# Altium PCB ESP_helper.PcbDoc
Units mil, origin at the board's own origin, x right, y up, seen from the top; angles counter-clockwise.
Board outline 1800 x 825 mil, 2 copper layers (Top Layer, Bottom Layer); 3 components, 3 nets, 17 pads, 0 vias.
Unrouted connection lines stored in the file: 3.
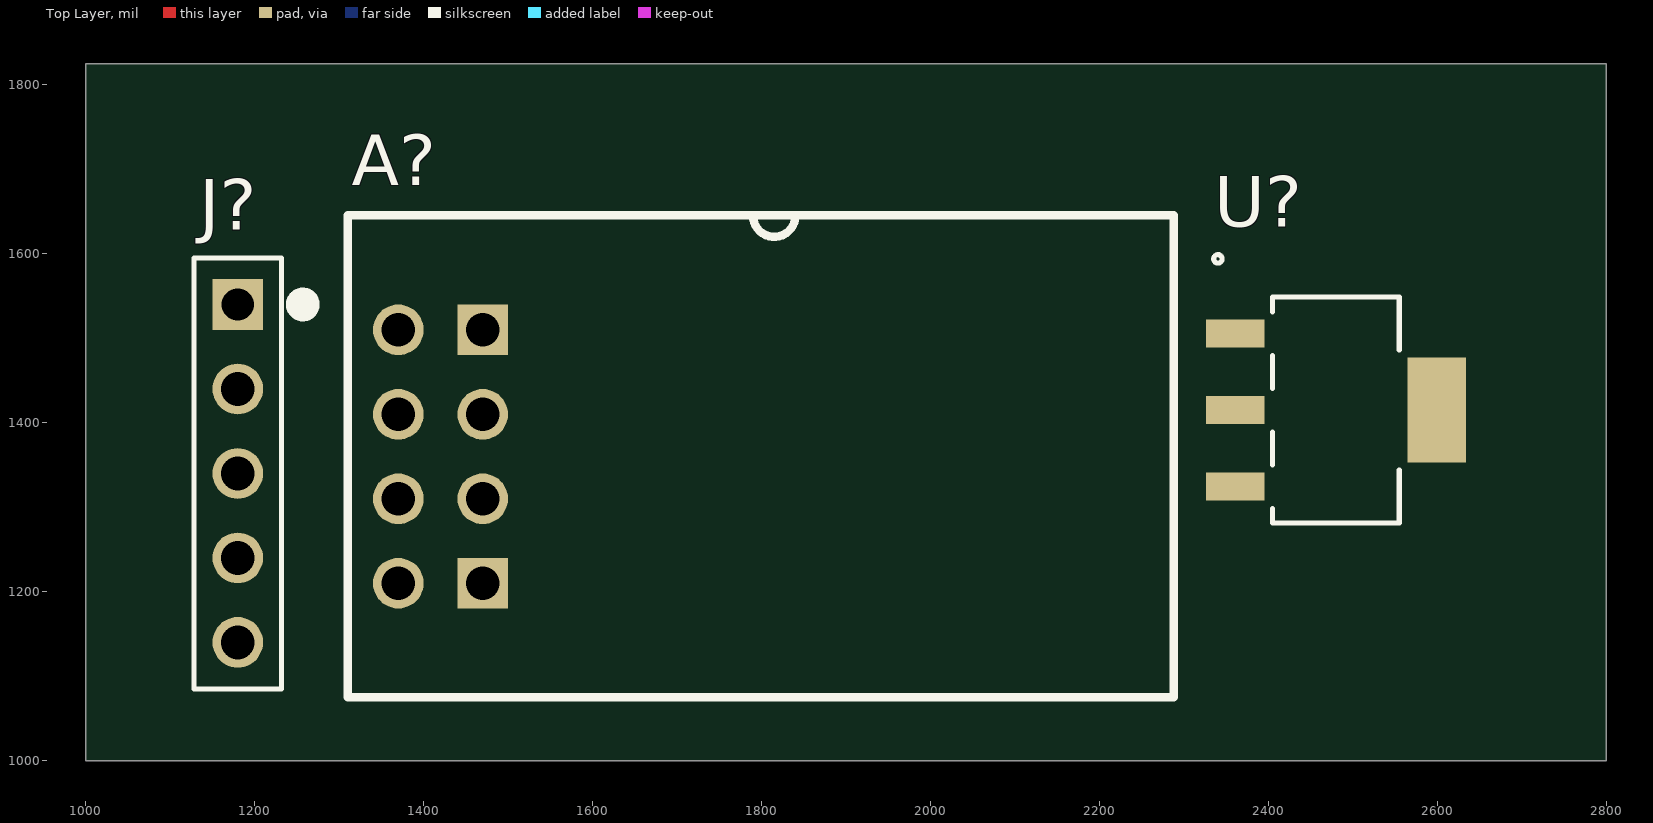
[diagram p0: Top Layer view]
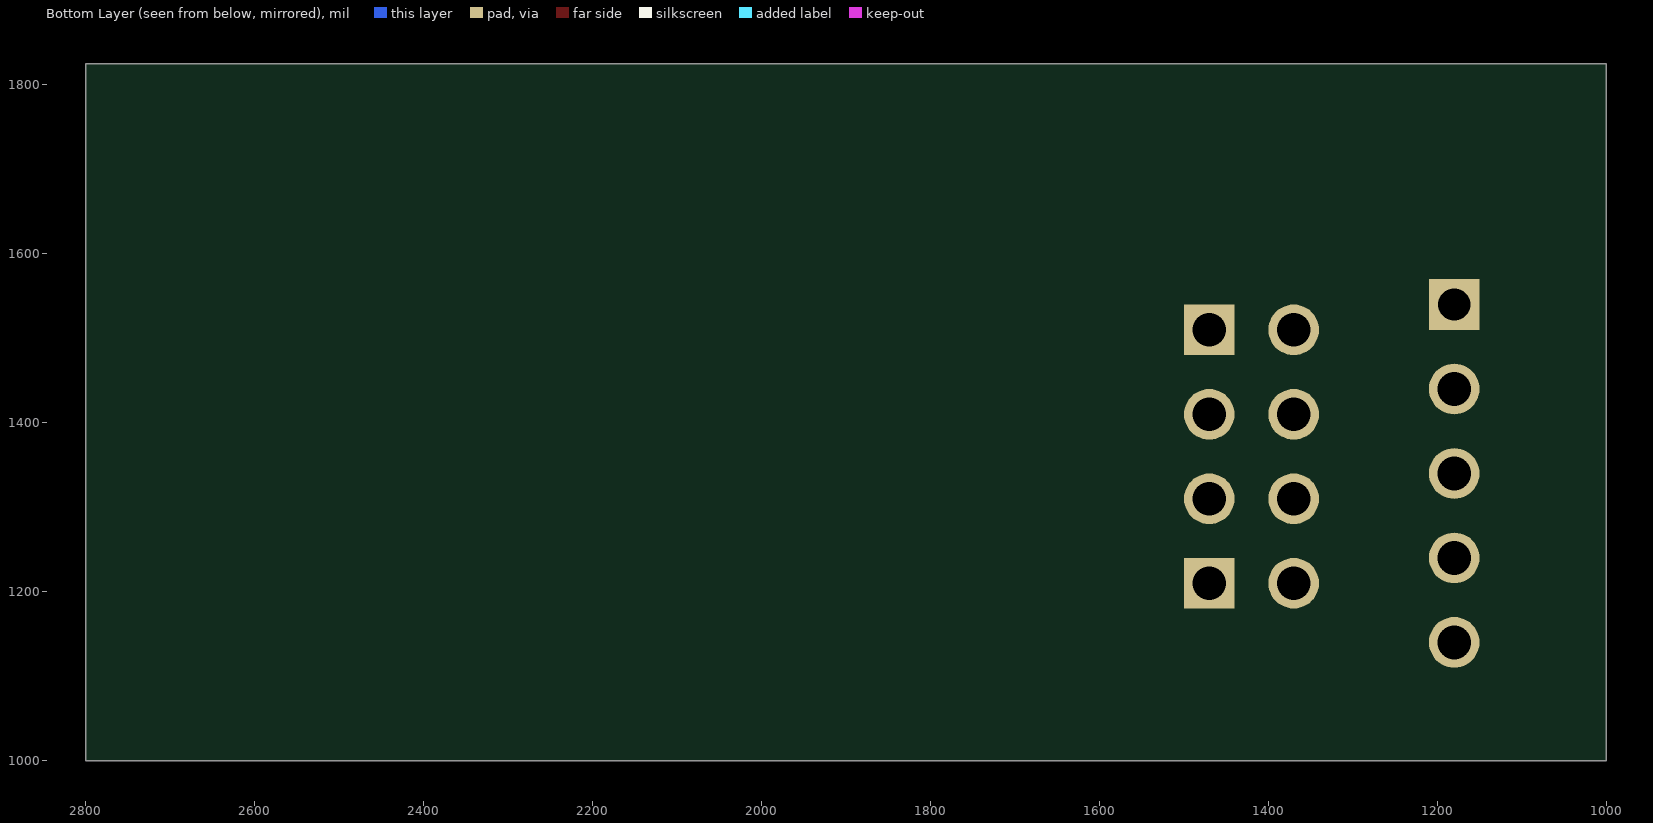
[diagram p1: Bottom Layer view, seen from below]

## Layer stack, top to bottom
Top Solder: solder mask 0.4, Solder Resist, Dk 3.5
Top Layer: signal copper 1.4
Dielectric 1: dielectric 12.6, FR-4, Dk 4.8
Bottom Layer: signal copper 1.4
Bottom Solder: solder mask 0.4, Solder Resist, Dk 3.5

## Board outline
1000,1000 2800,1000 2800,1825 1000,1825

## Design rules (kind name [scope] priority, off if disabled: settings)
Clearance [All] p1: gap=10 ignorepadtopadclearanceinfootprint=FALSE except(0: Arc-Hole Track-Hole SMDPad-Hole THPad-Hole Via-Hole Fill-Hole Poly-Hole Region-Hole Text-Hole)
PolygonConnect [All] p1: connectstyle=Relief reliefconductorwidth=10 reliefentries=4 polygonreliefangle="90 Angle" airgapwidth=10
RoutingVias [All] p1: holewidth=28 width=50 viastyle="Through Hole" minholewidth=28 minwidth=50 maxholewidth=28 maxwidth=50
SolderMaskExpansion [All] p1: expansion=4
Width [All] p1: maxlimit=10 minlimit=10 preferedwidth=10
30 further rules are at their usual default settings.

## Components (designator, comment, footprint, x,y, rotation, side; value= is the part's Value field where it differs from the comment)
A? "ESP8266" ESP8266 1370,1510 r0 top
J? "5x Header Pins" "5 HEADER PIN" 1180,1540 r90 top value=Value
U? "3.3V regulator" SOT-223 2480,1415 r270 top

## Footprints (in the part's own frame and the unit in brackets; to place one, negate y for a bottom-side part, rotate by r counter-clockwise, add the part's x,y. Pads: shape width x height; smd on the part's side, far side on the other; paste and mask are expansions set on the pad)
"5 HEADER PIN" [mil]
  rect 60x60 hole 38 mask+0: 1(0,0)
  round 60 hole 40 mask+0: 2(-100,0) 3(-200,0) 4(-300,0) 5(-400,0)
  silkscreen extent -455,-87 55,52, body extent -450,-50 50,50, height 374
ESP8266 [mil]
  round 60 hole 40: 1(0,0) 2(0,-100) 3(0,-200) 4(0,-300) 6(100,-200) 7(100,-100)
  rect 60x60 hole 40: 5(100,-300) 8(100,0)
  silkscreen extent -60,-435 918,136, body extent -58,-436 918,135, height 221
SOT-223 [mm]
  rect 0.851x1.761 smd paste+0 mask+0: 1(-2.3,-3.025) 2(0,-3.025) 3(2.3,-3.025)
  rect 3.151x1.761 smd paste+0 mask+0: 2(0,3.025)
  silkscreen extent -4.67,-3.68 3.4,1.9, body extent -3.27,-3.68 5.33,3.42, height 1.65

## Part data
A?: "RX TXRX MODULE WIFI TRACE ANT TH", Supplier Part Number 1=1597-1145-ND, Supplier 1=Digi-Key
J?: library part "5x Header Pin", "CONN HEADER VERT 5POS 2.54MM", Manufacturer_Part_Number=77311-818-36LF, Built_By=EMA_UL_Team, Copyright="Copyright (C) 2018 Accelerated Designs. All rights reserved", RefDes=RefDes, SourceLibrary=Amphenol_2013-08-06_Bergstik_1Row_77311, Type=DEV, Vendor=Amphenol
U?: library part AP7361-33E-13, "IC REG LINEAR 3.3V 1A SOT223", Supplier Part Number 1=AP7361-33E-13DICT-ND, Built_By=EMA_UL_Team, Copyright="Copyright (C) 2018 Accelerated Designs. All rights reserved", Manufacturer_Part_Number=AP7361-33E-13, RefDes=RefDes, SourceLibrary=DIODESINC_2_2015-08-18, Supplier 1=Digi-Key, Type=DEV, Vendor="Diodes Inc"

## Nets (pads, with @x,y where several pads share a name; then routed paths per layer and width w, separated by ;. In a path a pad name is that pad's centre, name@x,y a point inside that pad or via, vN(x,y) a via of type N, cw(c..) or ccw(c..) an arc to the next point about the centre after c; other vN are vias at no path point)
+3.3: A?.4 U?.3
+5: U?.1
GND: A?.8 U?.2
pads on no net: A?.1 A?.2 A?.3 A?.5 A?.6 A?.7 J?.1 J?.2 J?.3 J?.4 J?.5